# EAGLE board ROB v2 v1 (EAGLE 9.6.2)
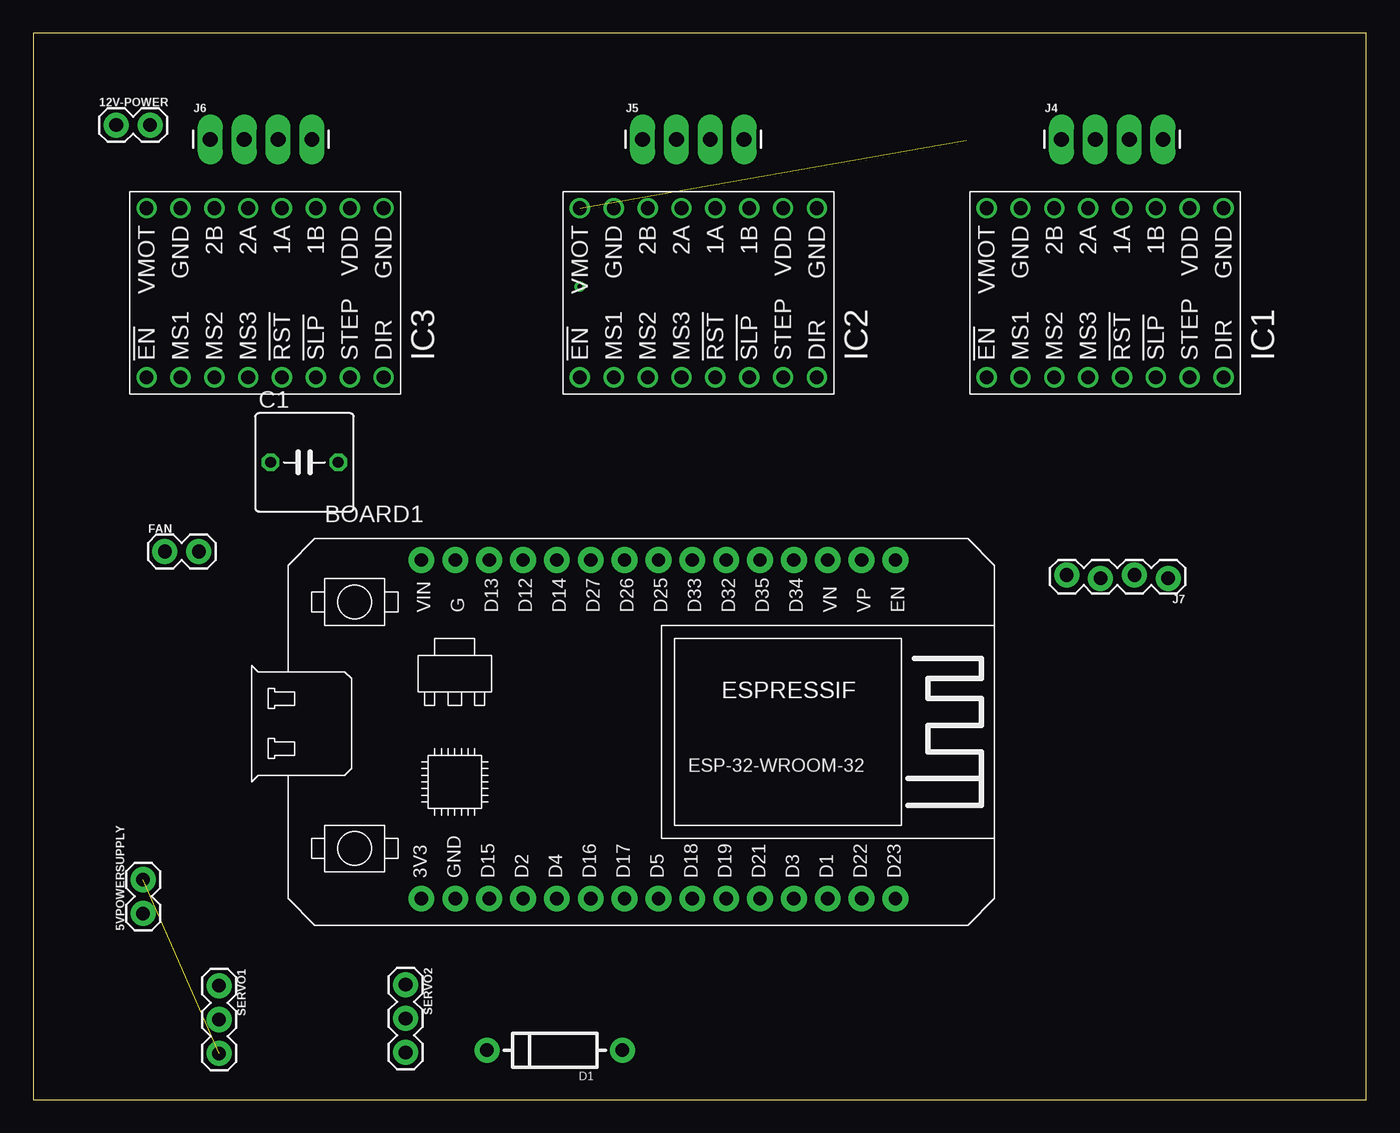
[diagram p0: board, top side]
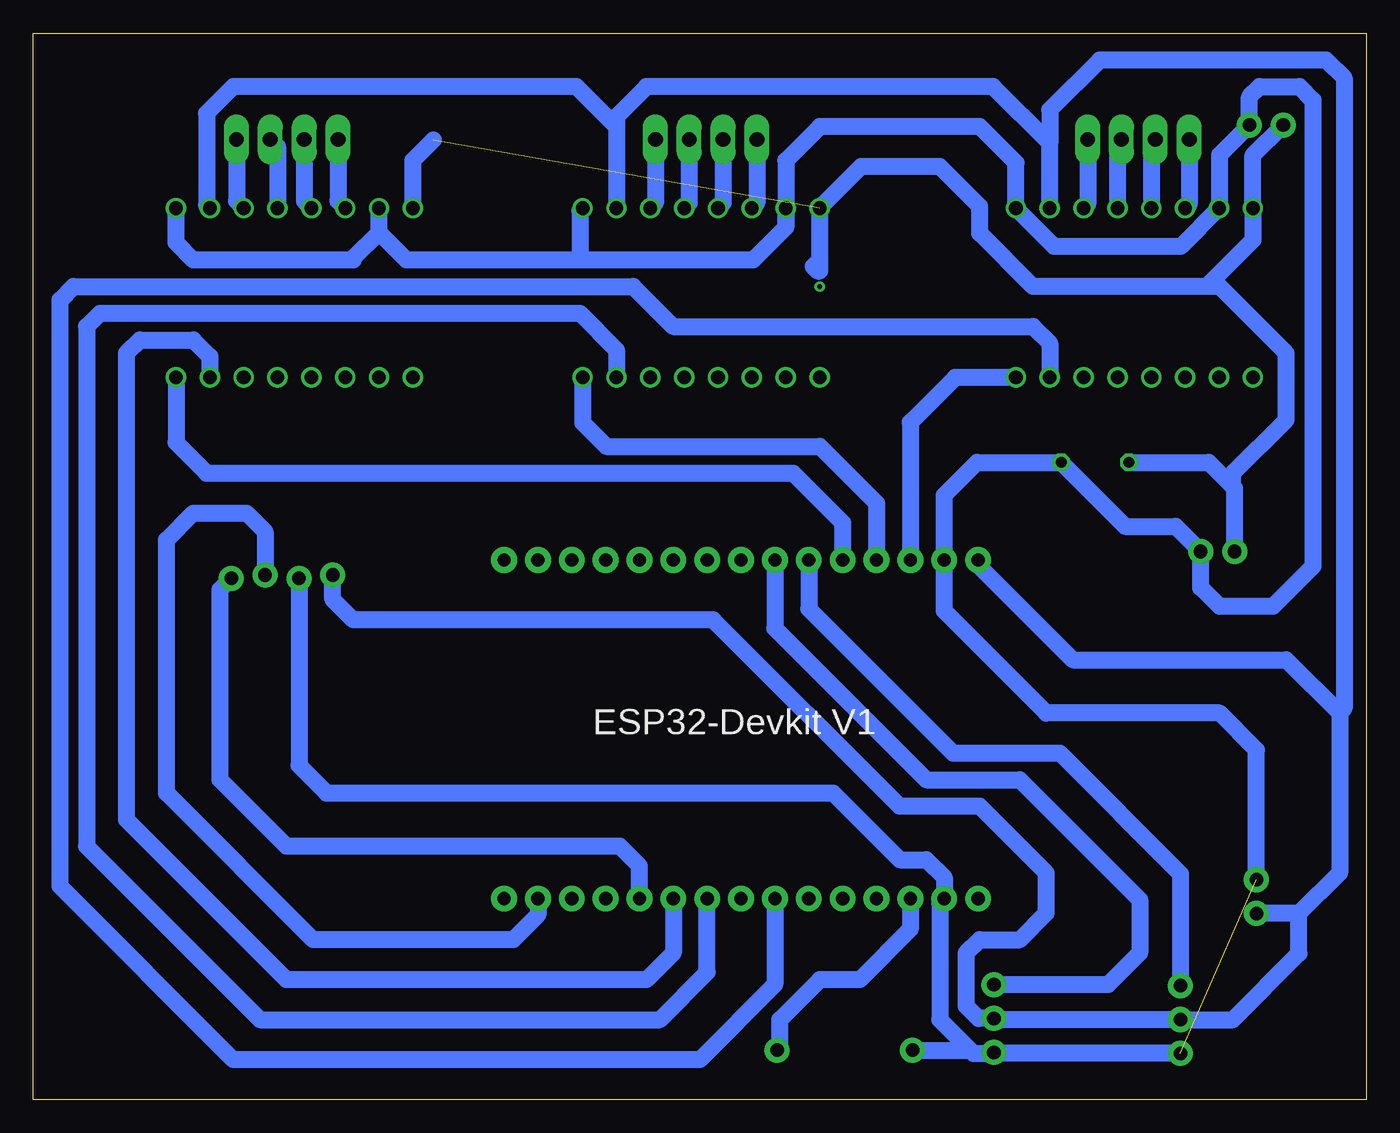
[diagram p1: board, bottom side, seen from below]

Size 100 x 80 mm. Coordinates in mm from the lower left corner, seen from the top.
Outline: 0,0 100,0 100,80 0,80 0,0
Copper layers (1*16): Top 0.035mm / dielectric 1.5mm / Bottom 0.035mm
Design rules "default": minimum track width 6mil, minimum drill 0.35mm, track to track 6mil, track to pad 6mil, pad to pad 6mil, via to via 6mil, smd to smd 6mil, copper to edge 40mil, drill to drill 6mil, minimum pad ring 10mil, minimum via ring 8mil, stop-mask expansion 4mil, vias tented up to drill 0mil, thermal gap 10mil

## Footprints (pad centres in the part's own frame; a part is rotated, then mirrored left to right if it is on the bottom)
1X02 = drill 1.016 pad 1.88: 1 0,0; 2 2.54,0
ESP32-DEVKITV1 = drill 1 pad 1.93: 3V3 0,0; D1 30.48,0; D2 7.62,0; D3 27.94,0; D4 10.16,0; D5 17.78,0; D12 7.62,25.4; D13 5.08,25.4; D14 10.16,25.4; D15 5.08,0; D16 12.7,0; D17 15.24,0; D18 20.32,0; D19 22.86,0; D21 25.4,0; D22 33.02,0; D23 35.56,0; D25 17.78,25.4; D26 15.24,25.4; D27 12.7,25.4; D32 22.86,25.4; D33 20.32,25.4; D34 27.94,25.4; D35 25.4,25.4; EN 35.56,25.4; GND 2.54,25.4; GND@1 2.54,0; VIN 0,25.4; VN 30.48,25.4; VP 33.02,25.4
C050-075X075 = drill 0.813 octagon: 1 -2.54,0; 2 2.54,0
DIODE-1N4001-KIT = drill 1.016 pad 1.88: A -5.08,0; C 5.08,0
A4988 = drill 1.016: 1 -6.35,8.89; 2 -6.35,6.35; 3 -6.35,3.81; 4 -6.35,1.27; 5 -6.35,-1.27; 6 -6.35,-3.81; 7 -6.35,-6.35; 8 -6.35,-8.89; 9 6.35,-8.89; 10 6.35,-6.35; 11 6.35,-3.81; 12 6.35,-1.27; 13 6.35,1.27; 14 6.35,3.81; 15 6.35,6.35; 16 6.35,8.89
1X04_LONGPADS = drill 1.118 pad 1.88 long: 1 0,0; 2 2.54,0; 3 5.08,0; 4 7.62,0
1X04_LOCK = drill 1.016 pad 1.88: 1 0,0.127; 2 2.54,-0.127; 3 5.08,0.127; 4 7.62,-0.127
1X03 = drill 1.016 pad 1.88: 1 0,0; 2 2.54,0; 3 5.08,0

## Placement (x,y rotation side)
5VPOWERSUPPLY  [1X02]  8.23,13.96 90 top
12V-POWER  [1X02]  6.22,73.12 0 top
BOARD1  ESP32DEVKITV1  [ESP32-DEVKITV1]  29.12,15.08 0 top
C1  [C050-075X075]  20.34,47.81 0 top
D1  [DIODE-1N4001-KIT]  39.12,3.7 180 top
FAN  [1X02]  9.87,41.12 0 top
IC1  1182-A4988  [A4988]  80.41,60.53 90 top
IC2  1182-A4988  [A4988]  49.9,60.53 90 top
IC3  1182-A4988  [A4988]  17.39,60.53 90 top
J4  [1X04_LONGPADS]  77.14,72.04 0 top
J5  [1X04_LONGPADS]  45.71,72.04 0 top
J6  [1X04_LONGPADS]  13.28,72.04 0 top
J7  [1X04_LOCK]  85.15,39.23 180 top
SERVO1  455-1750-1-ND  [1X03]  13.93,8.54 270 top
SERVO2  455-1750-1-ND  [1X03]  27.93,8.62 270 top

## Library data of the parts
5VPOWERSUPPLY 12V-POWER FAN = SparkFun-Connectors
BOARD1 = ESP32-DEVKITV1
C1 = BeagleBone_Black_Wireless
D1 = BeagleBone_Blue_R3
IC1-IC3 = pololu-stepper-driver
J4-J7 = SparkFun-Connectors; PROD_ID: CONN-09696
SERVO1 SERVO2 = SparkFun-Connectors; PROD_ID: XXX-00000

## Nets
1A1: IC2.11 J5.4
1A2: IC2.13 J5.2
1B1: IC2.12 J5.3
1B2: IC2.14 J5.1
2A1: IC1.12 J4.3
2A2: IC1.13 J4.2
2B1: IC1.11 J4.4
2B2: IC1.14 J4.1
3A1: IC3.11 J6.4
3A2: IC3.13 J6.2
3B1: IC3.12 J6.3
3B2: IC3.14 J6.1
5V: 5VPOWERSUPPLY.1 BOARD1.VIN IC1.10 IC2.10 IC3.10 J7.4 SERVO1.2 SERVO2.2
12V: 12V-POWER.1 C1.1 FAN.1 IC1.16 IC2.16 IC3.16
DIR1: BOARD1.D14 IC1.8
DIR2: BOARD1.D12 IC2.8
DIR3: BOARD1.D13 IC3.8
GND: 5VPOWERSUPPLY.2 12V-POWER.2 BOARD1.GND BOARD1.GND@1 C1.2 D1.C FAN.2 IC1.9 IC1.15 IC2.9 IC2.15 IC3.9 IC3.15 J7.3 SERVO1.3 SERVO2.3
LED: BOARD1.D15 D1.A
N$3: BOARD1.D16
SCL: BOARD1.D22 J7.2
SDA: BOARD1.D21 J7.1
SIG1: BOARD1.D26 SERVO2.1
SIG2: BOARD1.D27 SERVO1.1
STEP1: BOARD1.D19 IC1.7
STEP2: BOARD1.D18 IC2.7
STEP3: BOARD1.D17 IC3.7

## Tracks (layer width: path | path; a pad name or v marks a point on that pad's centre or on a via)
1A1
  Bottom 1.27: J5.4 53.33,67.26 IC2.11
1A2
  Bottom 1.27: J5.2 48.25,67.26 IC2.13
1B1
  Bottom 1.27: J5.3 50.79,67.26 IC2.12
1B2
  Bottom 1.27: J5.1 45.71,67.26 IC2.14
2A1
  Bottom 1.27: J4.3 81.68,71.5 IC1.12
2A2
  Bottom 1.27: J4.2 79.68,67.42 IC1.13
2B1
  Bottom 1.27: J4.4 84.76,67.42 IC1.11
2B2
  Bottom 1.27: J4.1 77.14,67.42 IC1.14
3A1
  Bottom 1.27: J6.4 20.9,67.18 IC3.11
3A2
  Bottom 1.27: J6.2 16.12,71.74 IC3.13
3B1
  Bottom 1.27: J6.3 18.66,71.74 IC3.12
3B2
  Bottom 1.27: J6.1 13.28,67.18 IC3.14
5V
  Bottom 1.27: IC3.10 23.74,71.74 | 56.25,73 56.25,73.75 54,76 28,76 23.74,71.74 | 56.25,73 IC2.10 | 56.25,73 59.25,76 85,76 87,74 87,67.12 IC1.10 | 23.74,71.74 23.74,74.26 20,78 3,78 1.65,76.65 1.65,29.35 2,29 | 8.27,14 5VPOWERSUPPLY.1 5.04,13.96 | BOARD1.VIN 29.12,40.12 22,33 6,33 2,29 | 2,29 2,17 5.04,13.96 | 5.04,13.96 5.04,10.96 10,6 SERVO1.2 27.85,6 SERVO2.2 29.08,6.08 30,7 30,11 29,12 26,12 24,14 24,17 29,22 35,22 49,36 76,36 77.53,37.53 J7.4
12V  (1 unrouted)
  Bottom 1.27: 12,61 25,61 29,65 29,67 32,70 37.89,70 IC2.16 41.01,63.01 41,63 | 12,61 8.5,64.5 IC3.16 8.5,70.84 12V-POWER.1 | IC1.16 71.52,70.48 70,72 | 41,63 41.5,62.5 41.17,62.17 41,62.17 41,63 | FAN.1 9.87,45.87 10,46 | 10,46 10,47 6,51 6,56 11,61 12,61 | C1.1 11.81,47.81 10,46
DIR1
  Bottom 1.27: IC1.8 89.3,49.3 87,47 43,47 39.28,43.28 BOARD1.D14
DIR2
  Bottom 1.27: IC2.8 58.79,50.79 57,49 41,49 36.74,44.74 BOARD1.D12
DIR3
  Bottom 1.27: IC3.8 30.82,54.18 34.2,50.8 BOARD1.D13
GND  (1 unrouted)
  Bottom 1.27: 43.55,65.55 IC2.15 | IC2.15 43.55,65.45 46,63 59,63 | 59,63 72,63 74.06,65.06 | 74.06,65.06 IC1.15 | 74.06,65.06 76,63.12 76,63 88,63 89.3,64.3 IC1.9 | IC2.9 59,66.67 59,63 | IC2.15 43.55,70.45 41,73 29,73 26.28,70.28 IC3.9 23.4,64 13.92,64 IC3.15 11,66.92 11,70.88 12V-POWER.2 8.76,75.24 8,76 5,76 4,75 4,40 7,37 11,37 12.41,38.41 FAN.2 14.29,43 18.07,43 C1.2 29.19,47.81 31.66,45.34 BOARD1.GND 31.66,36.66 24,29 11,29 8.23,26.23 5VPOWERSUPPLY.2 | SERVO1.3 27.85,3.46 | 27.85,3.46 SERVO2.3 | 27.85,3.46 29.46,3.46 29.7,3.7 | 29.7,3.7 32,6 32,14.74 BOARD1.GND@1 31.66,16.66 33,18 35,18 40,23 78,23 80.07,25.07 J7.3 | D1.C 29.7,3.7
LED
  Bottom 1.27: BOARD1.D15 34.2,12.8 38,9 41,9 44,6 44,3.9 D1.A
N$1  (via drill 0.35)
  other vias: 41,61
SCL
  Bottom 1.27: BOARD1.D22 62.14,13.86 64,12 79,12 90,23 90,42 88,44 84,44 82.61,42.61 J7.2
SDA
  Bottom 1.27: BOARD1.D21 54.52,17.52 56,19 81,19 86,24 86,38.25 J7.1
SIG1
  Bottom 1.27: BOARD1.D26 44.36,35.36 33,24 26,24 17,15 17,11 19.38,8.62 SERVO2.1
SIG2
  Bottom 1.27: BOARD1.D27 41.82,36.82 31,26 23,26 13.93,16.93 SERVO1.1
STEP1
  Bottom 1.27: BOARD1.D19 51.98,11.02 54,9 81,9 93,21 93,56 92,57 88,57 86.76,55.76 IC1.7
STEP2
  Bottom 1.27: IC2.7 56.25,56.25 59,59 95,59 96,58 96,19 83,6 53,6 49.44,9.56 BOARD1.D18
STEP3
  Bottom 1.27: BOARD1.D17 44.36,8.64 50,3 85,3 98,16 98,60 97,61 55,61 52,58 25,58 23.74,56.74 IC3.7